# Altium PCB STM32_PCB_Design.PcbDoc
Units mm, origin at the board's own origin, x right, y up, seen from the top; angles counter-clockwise.
Board outline 31 x 33 mm, 4 copper layers (Top Layer, L2 (GND), L3 (GND), Bottom Layer), stack 1.57 mm thick; 35 components, 27 nets, 170 pads, 63 vias.
Unrouted connection lines stored in the file: 2.
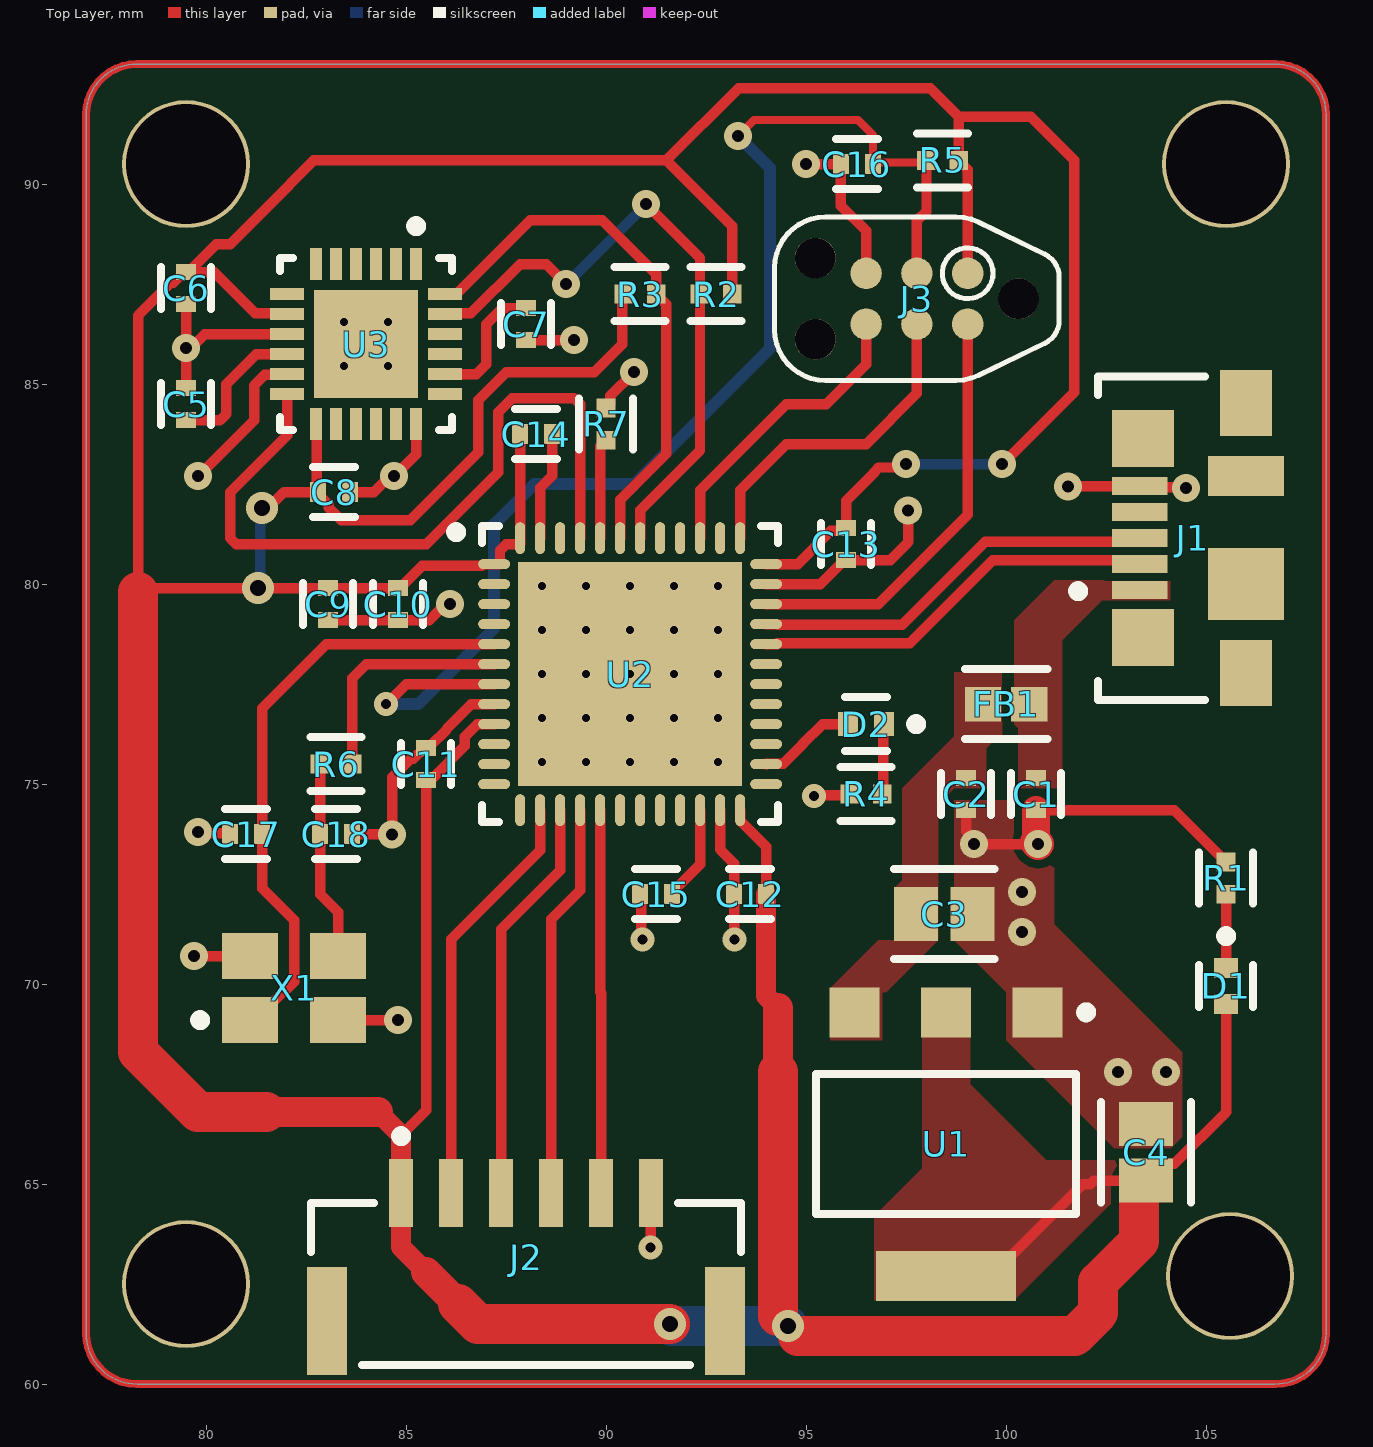
[diagram p0: Top Layer view]
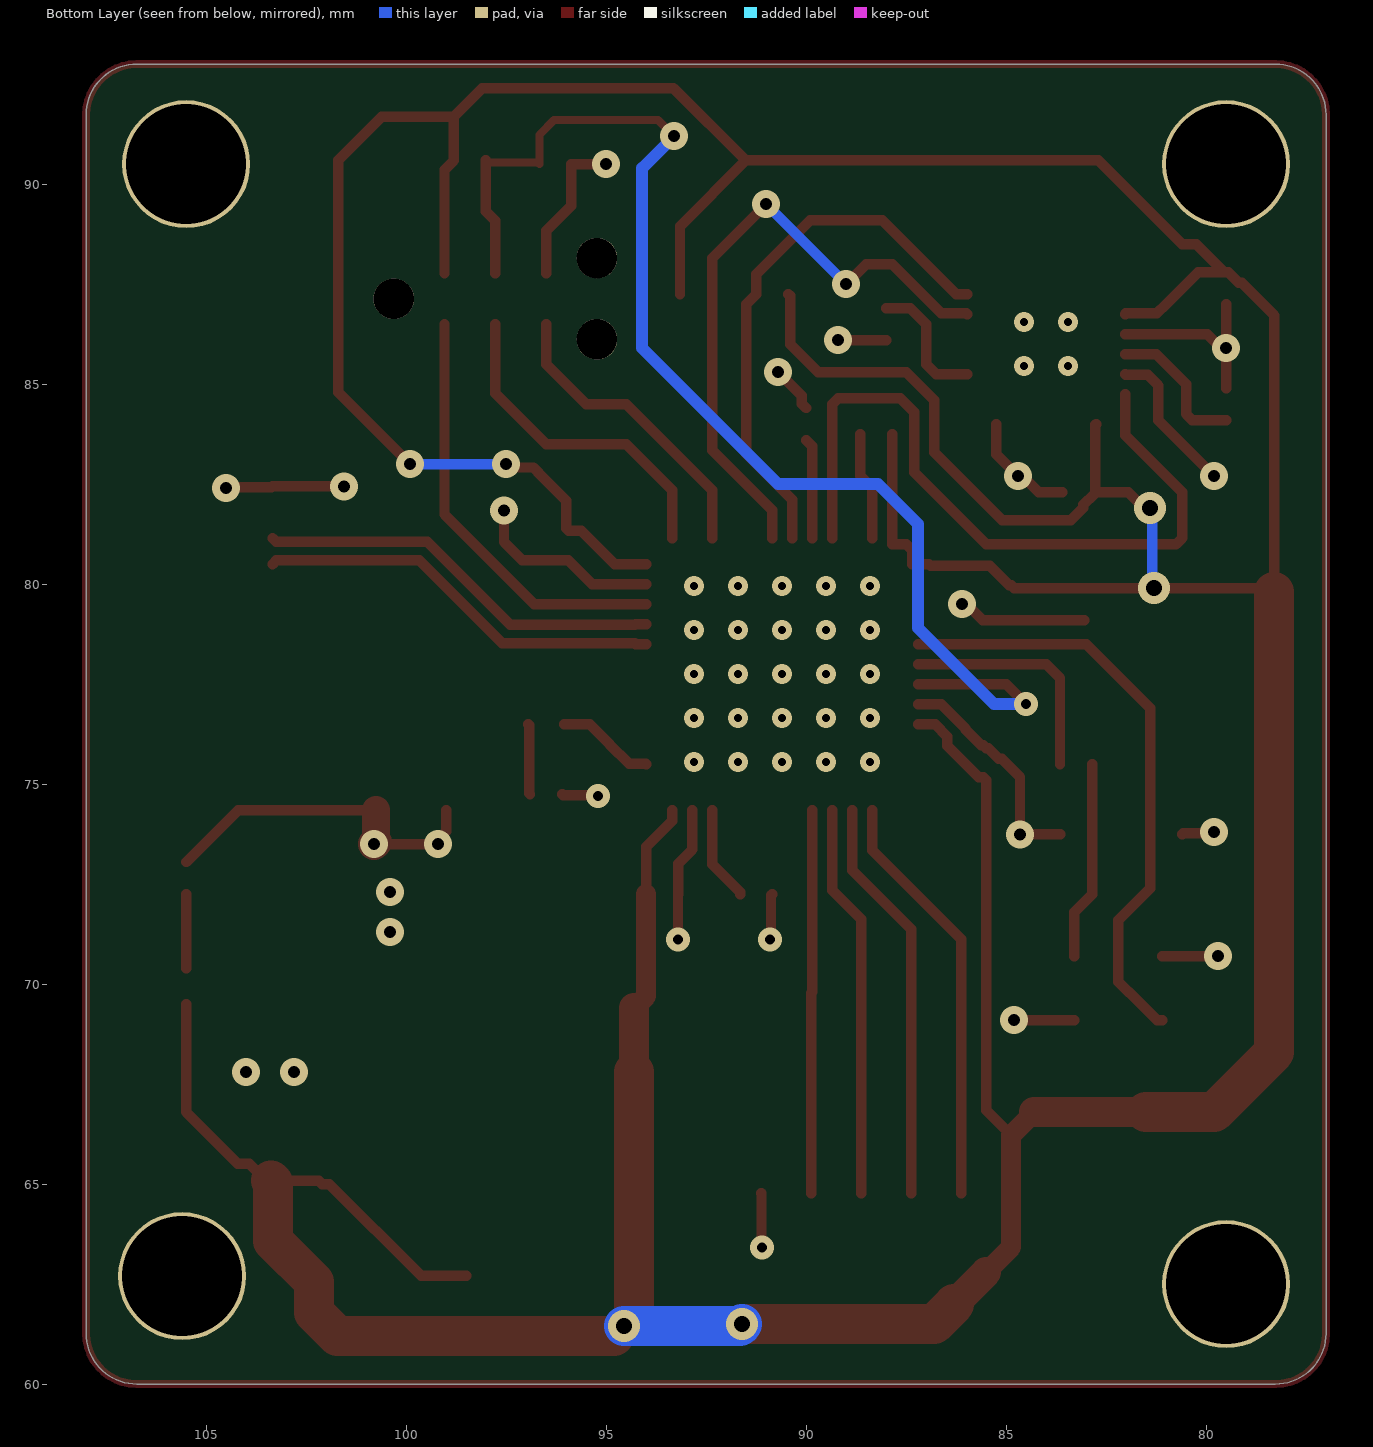
[diagram p1: Bottom Layer view, seen from below]
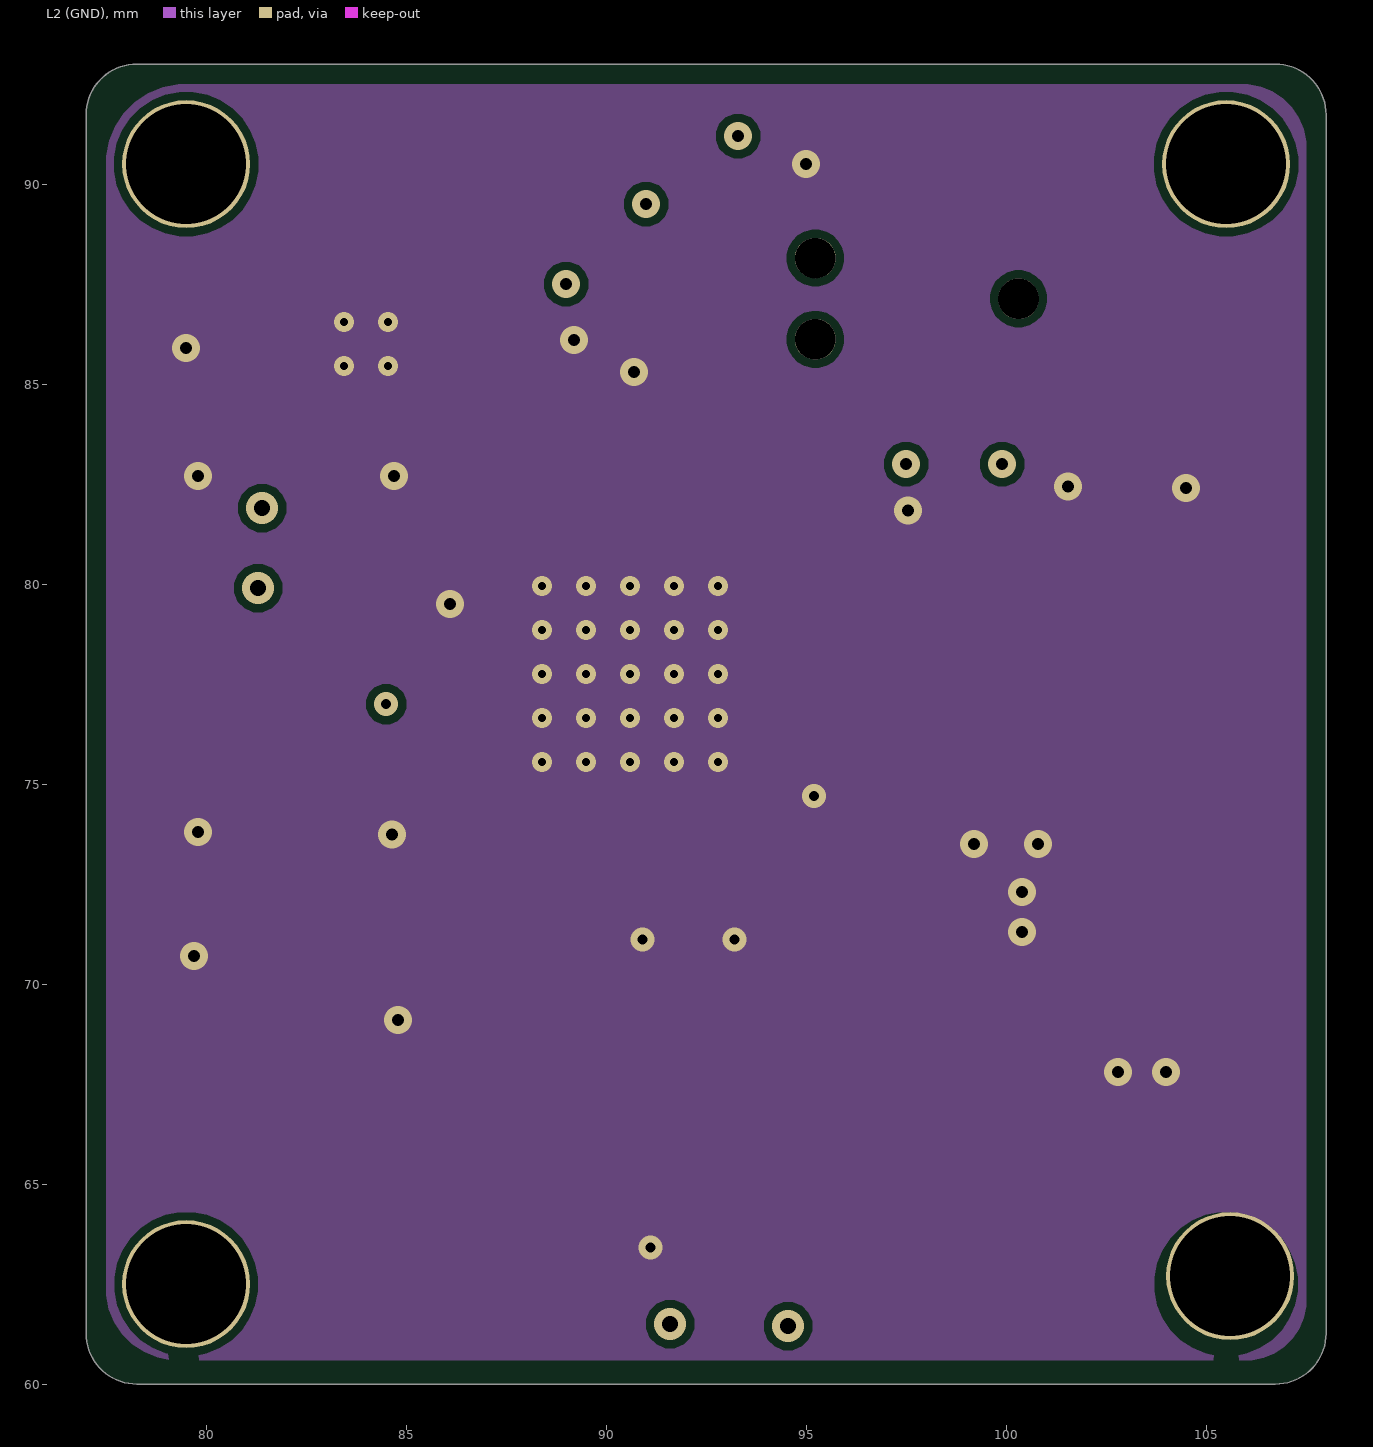
[diagram p2: L2 (GND)]
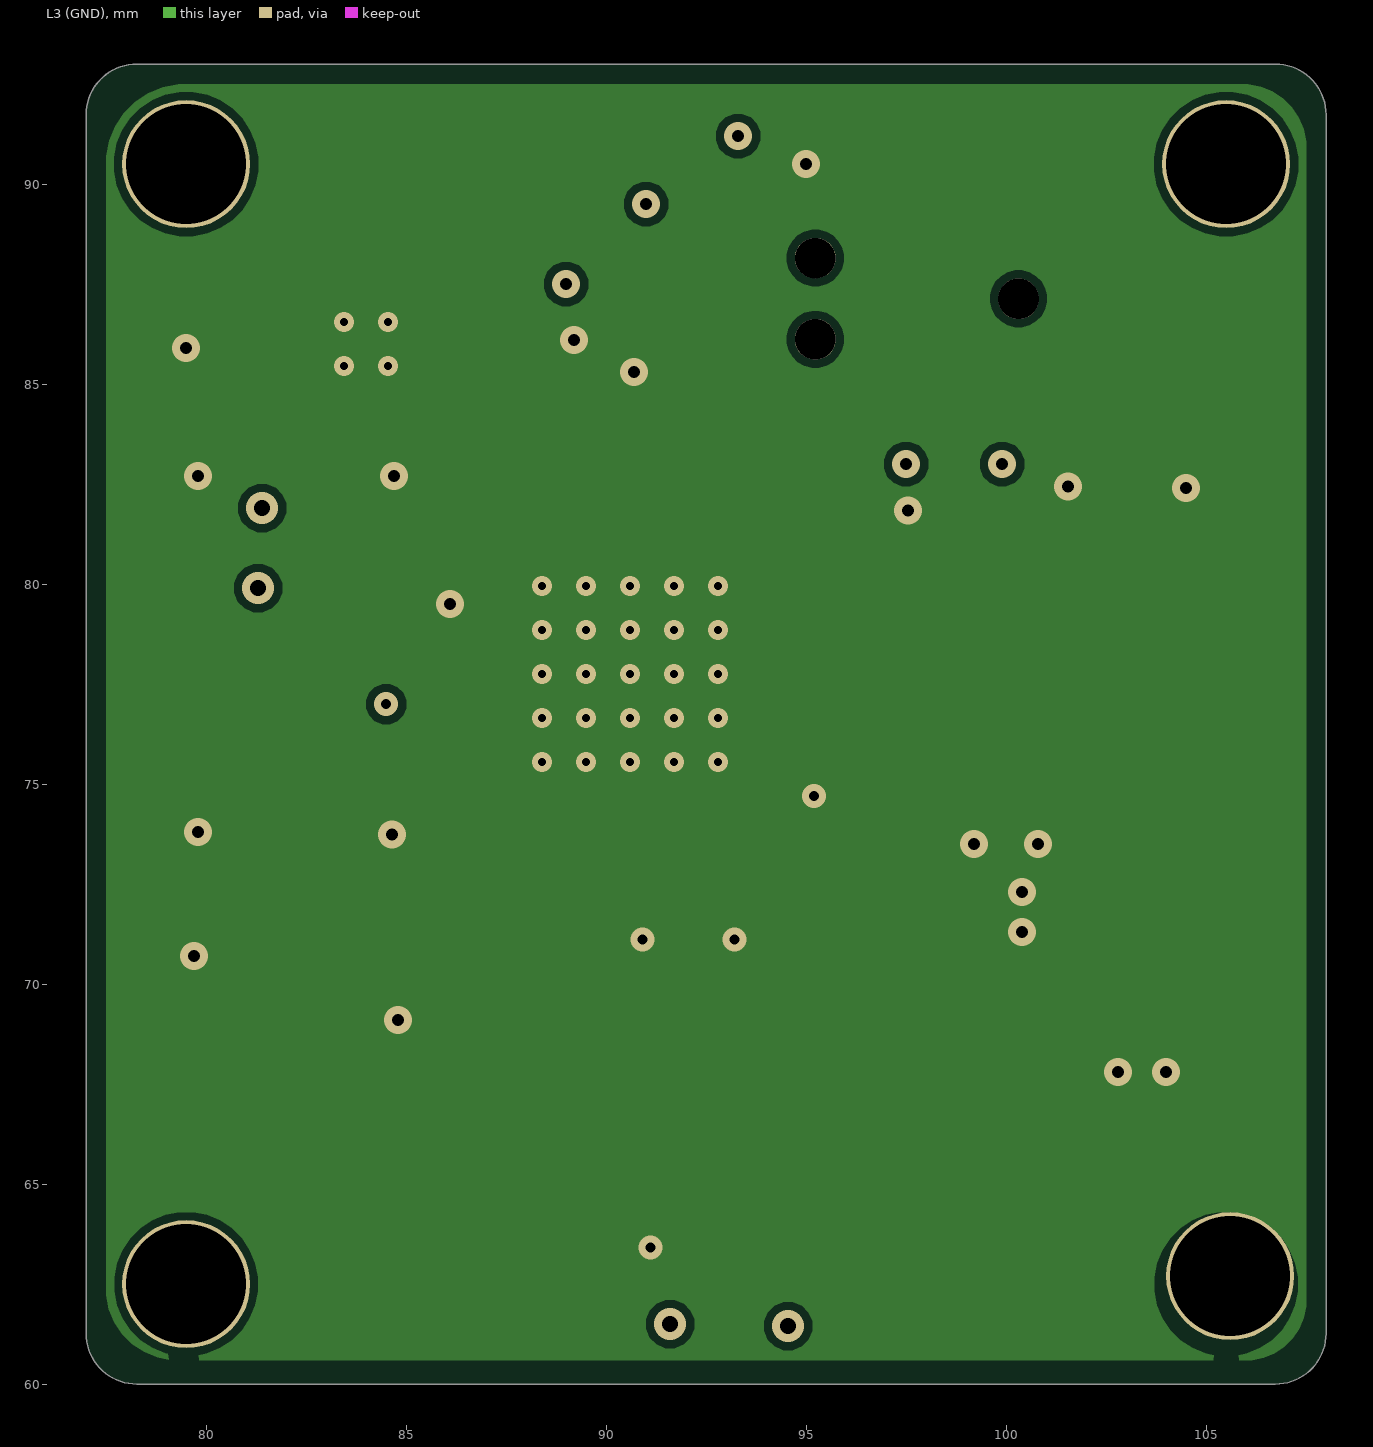
[diagram p3: L3 (GND)]
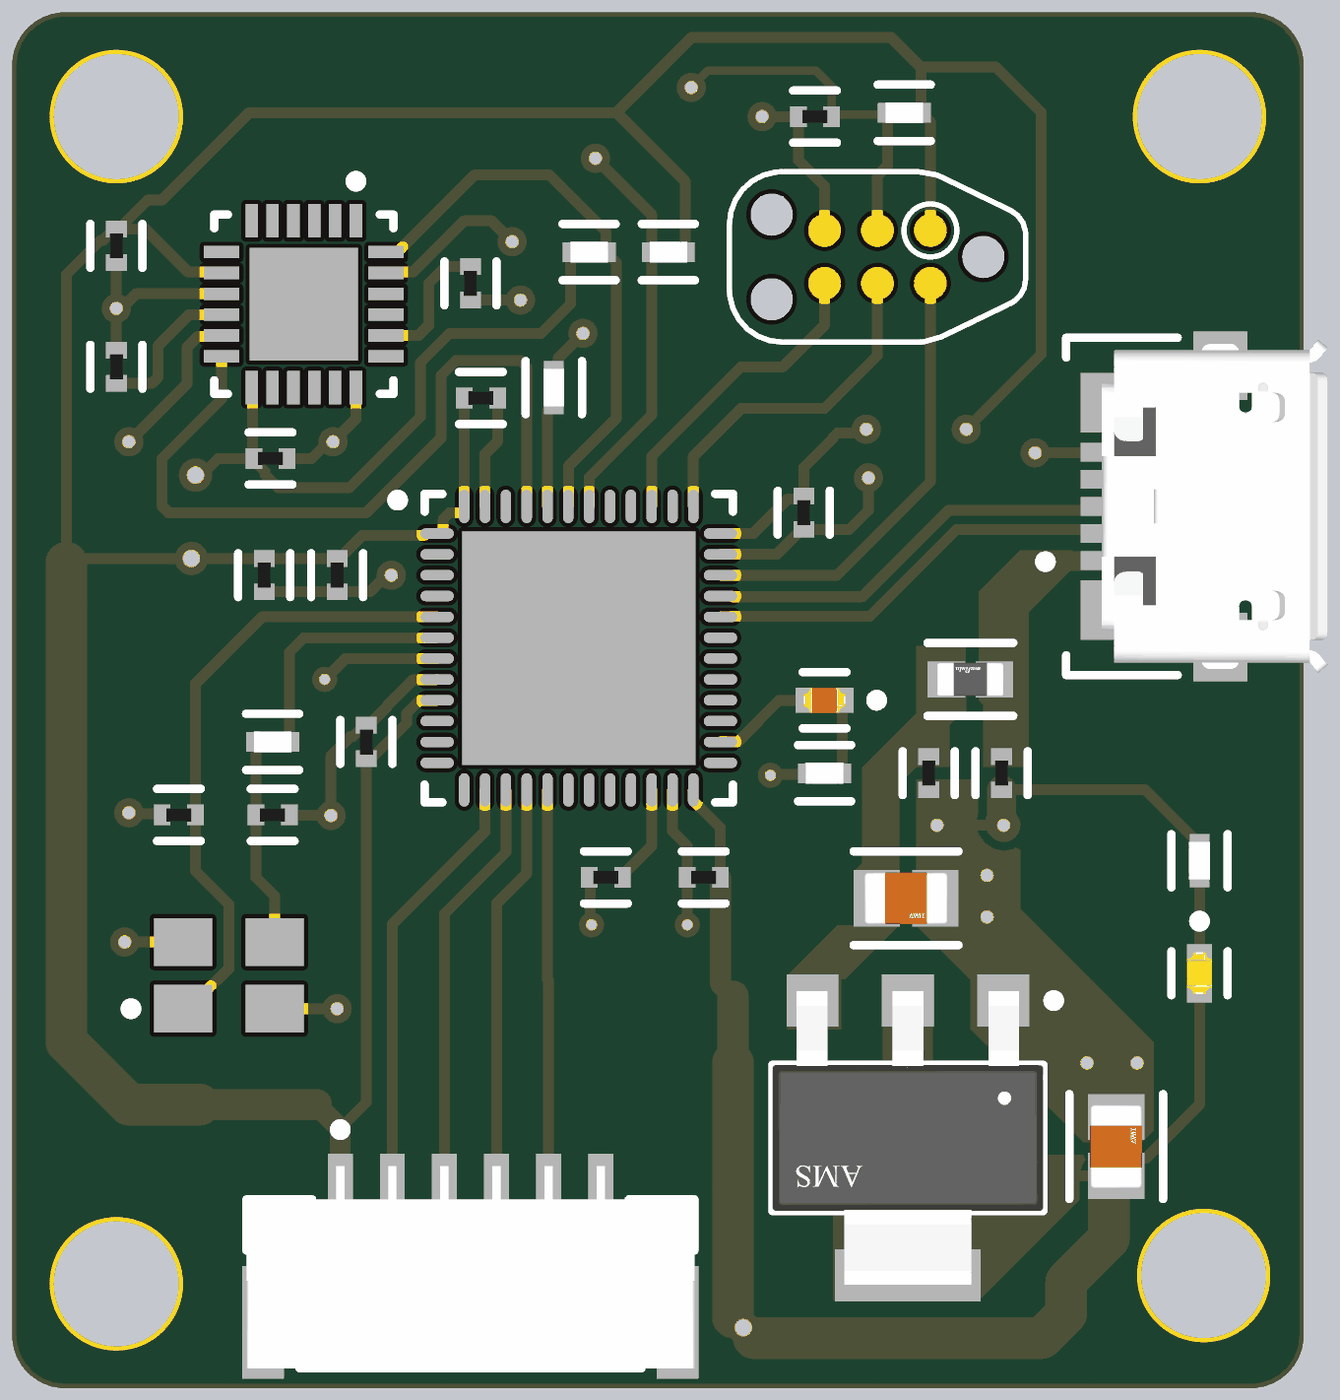
[diagram p4: 3D render of the assembled board from above, using the file's embedded part models]

## Layer stack, top to bottom
Top Solder: solder mask 0.0254, SM-001, Dk 4
Top Layer: signal copper 0.035
Dielectric 1: prepreg 0.2, PP-017, Dk 4.6
L2 (GND): signal copper 0.0175
Dielectric 3: core 1.065, Core-039, Dk 4.6
L3 (GND): signal copper 0.0175
Dielectric 5: prepreg 0.2, PP-017, Dk 4.6
Bottom Layer: signal copper 0.035
Bottom Solder: solder mask 0.0254, SM-001, Dk 4

## Board outline
77,61.27 77,91.73 cw(c78.27,91.73) 78.27,93 106.73,93 cw(c106.73,91.73) 108,91.73 108,61.27 cw(c106.73,61.27) 106.73,60 78.27,60 cw(c78.27,61.27)

## Design rules (kind name [scope] priority, off if disabled: settings)
Clearance [All] p1: gap=0.2 ignorepadtopadclearanceinfootprint=FALSE
DiffPairsRouting [All] p1: maxlimit=0.254 minlimit=0.203 mostfreqgap=0.254 toplayer_maxgap=0.203 toplayer_prefgap=0.203 toplayer_minwidth=0.26 toplayer_maxwidth=0.26 toplayer_prefwidth=0.26 bottomlayer_maxgap=0.203 bottomlayer_prefgap=0.203 bottomlayer_minwidth=0.26 bottomlayer_maxwidth=0.26 bottomlayer_prefwidth=0.26 impedanceprofiledriven=TRUE impedanceprofileid={CE58807C-ADA3-45CD-A579-9E1DF08962FE} impedanceprofilevalue=90.000000 maxuncoupledlength=12.7
PolygonConnect [All] p1: connectstyle=Direct reliefconductorwidth=0.254 reliefentries=4 polygonreliefangle="90 Angle" airgapwidth=0.254
RoutingVias [All] p1: holewidth=0.3 width=0.7 viastyle="Through Hole" minholewidth=0.25 minwidth=0.55 maxholewidth=0.4 maxwidth=0.9
SolderMaskExpansion [All] p1: expansion=0.102 istentingtop=FALSE
UnRoutedNet [All] p1: checkbadconnections=TRUE
Width [All] p1: maxlimit=1 minlimit=0.2 preferedwidth=0.3 midlayer1_minwidth=0.254 midlayer1_maxwidth=0.254 midlayer1_prefwidth=0.254 midlayer2_minwidth=0.254 midlayer2_maxwidth=0.254 midlayer2_prefwidth=0.254 minimp=50.000000 maximp=50.000000 favimp=50.000000
28 further rules are at their usual default settings.

## Classes and differential pairs
differential pair class DIFF_USB: USB_D
differential pair USB_D: +USB_D_P -USB_D_N

## Components (designator, comment, footprint, x,y, rotation, side; value= is the part's Value field where it differs from the comment)
C1 "2.2u" FP-GRM15-MFG 100.75,74.75 r90 top value=0.10μF
C2 "2.2u" FP-GRM15-MFG 99,74.75 r90 top value=0.10μF
C3 "22u" FP-0805-L_2_01_0_2-W_1_25-IPC_C 98.456,71.75 r0 top
C4 "22u" FP-0805-L_2_01_0_2-W_1_25-IPC_C 103.5,65.794 r90 top
C5 "100n" FP-GRM15-MFG 79.5,84.5 r270 top value=0.10μF
C6 "10n" FP-GRM15-MFG 79.5,87.4 r90 top value=0.10μF
C7 "2.2n" FP-GRM15-MFG 88,86.5 r90 top value=0.10μF
C8 "100n" FP-GRM15-MFG 83.2,82.3 r180 top value=0.10μF
C9 "2.2u" FP-GRM15-MFG 83.05,79.5 r90 top value=0.10μF
C10 "100n" FP-GRM15-MFG 84.8,79.5 r90 top value=0.10μF
C11 "100n" FP-GRM15-MFG 85.5,75.5 r270 top value=0.10μF
C12 "100n" FP-GRM15-MFG 93.6,72.25 r0 top value=0.10μF
C13 "100n" FP-GRM15-MFG 96,81 r90 top value=0.10μF
C14 "100n" FP-GRM15-MFG 88.25,83.75 r180 top value=0.10μF
C15 "2.2u" FP-GRM15-MFG 91.25,72.25 r0 top value=0.10μF
C16 "100n" FP-GRM15-MFG 96.27,90.5 r0 top value=0.10μF
C17 "10p" FP-GRM15-MFG 81,73.75 r0 top value=0.10μF
C18 "10p" FP-GRM15-MFG 83.25,73.75 r180 top value=0.10μF
D1 "SML-P11MTT86" FP-SML-P11MTT86-MFG 105.5,69.95 r270 top
D2 "SML-P11UTT86" FP-SML-P11UTT86-MFG 96.5,76.5 r180 top
FB1 "120R" FP-BLM18-0_15-t0_8-IPC_C 100,77 r180 top
J1 "473460001" FP-473460001-MFG 105.65,81.15 r90 top
J2 "SM06B-GHS-TB(LF)(SN)" FP-SM06B-GHS-TB_LF_SN-MFG 88,62.5 r0 top
J3 "TC2030-CTX" TC2030-IDC-NL 97.77,87.135 r180 top
R1 "1k" FP-CRCW0402-e3-IPC_C 105.5,72.65 r270 top
R2 "2.2k" FP-CRCW0402-e3-IPC_C 92.75,87.25 r0 top
R3 "2.2k" FP-CRCW0402-e3-IPC_C 90.848,87.25 r180 top
R4 "1k" FP-CRCW0402-e3-IPC_C 96.5,74.75 r180 top
R5 "10k" FP-CRCW0402-e3-IPC_C 98.412,90.592 r0 top
R6 "0R" FP-CRCW0402-e3-IPC_C 83.25,75.5 r180 top
R7 "10k" FP-CRCW0402-e3-IPC_C 90,84 r270 top
U1 "AMS1117-3.3" FP-AMS1117-IPC_C 98.5,66 r270 top
U2 "STM32F411CEU6" STM-UFQFPN48_L 90.6,77.75 r0 top
U3 "MPU-6050" IS-QFN-24_V 84,86 r270 top
X1 "TSX-3225 24.0000MF15X-AC3" EPSON-TSX-3225_V 82.2,69.9 r0 top

## Footprints (in the part's own frame and the unit in brackets; to place one, negate y for a bottom-side part, rotate by r counter-clockwise, add the part's x,y. Pads: shape width x height; smd on the part's side, far side on the other; paste and mask are expansions set on the pad)
EPSON-TSX-3225_V [mm] "SMD, 4-Leads, Body 3.2x2.5mm"
  rect 1.4x1.15 smd: 1(-1.1,-0.8) 2(1.1,-0.8) 3(1.1,0.8) 4(-1.1,0.8)
  silkscreen extent -2.47,-0.92 -2.22,-0.68, body extent -1.6,-1.25 1.6,1.25, height 0.6
FP-0805-L_2_01_0_2-W_1_25-IPC_C [mm]
  rect 1.105x1.356 smd paste+0 mask+0: 1(-0.706,0) 2(0.706,0)
  silkscreen extent -1.26,-1.12 1.26,1.12, body extent -1.36,-0.82 1.36,0.82, height 0.25
FP-473460001-MFG [mm]
  rect 0.45x1.38 smd paste+0 mask+0: 1(-1.3,2.31) 2(-0.65,2.31) 3(0,2.31) 4(0.65,2.31) 5(1.3,2.31)
  rect 1.425x1.55 smd paste+0 mask+0: 6(-2.488,2.225) 7(2.488,2.225)
  rect 1.65x1.3 smd paste+0 mask+0: 8(-3.375,-0.35) 11(3.375,-0.35)
  rect 1.8x1.9 smd paste+0 mask+0: 9(-1.15,-0.35)
  rect 1x1.9 smd paste+0 mask+0: 10(1.55,-0.35)
  silkscreen extent -4.05,0.67 4.05,3.97, body extent -4.3,-2.48 4.3,3.45, height 0.25
FP-AMS1117-IPC_C [mm]
  rect 1.25x1.25 smd paste+0 mask+0: 1(-3.295,2.29) 2(-3.295,0) 3(-3.295,-2.29)
  rect 1.25x3.5 smd paste+0 mask+0: 4(3.295,0)
  silkscreen extent -3.42,-3.25 1.75,3.63, body extent -3.9,-3.35 3.9,3.35, height 0.25
FP-BLM18-0_15-t0_8-IPC_C [mm]
  rect 0.906x0.858 smd paste+0 mask+0: 1(-0.576,0) 2(0.576,0)
  silkscreen extent -1.03,-0.87 1.03,0.87, body extent -1.13,-0.58 1.13,0.58, height 0.25
FP-CRCW0402-e3-IPC_C [mm]
  rect 0.468x0.472 smd paste+0 mask+0: 1(-0.402,0) 2(0.402,0)
  silkscreen extent -0.64,-0.67 0.64,0.67, body extent -0.74,-0.38 0.74,0.38, height 0.25
FP-GRM15-MFG [mm]
  rect 0.4x0.5 smd paste+0 mask+0: 1(-0.4,0) 2(0.4,0)
  silkscreen extent -0.53,-0.63 0.53,0.63, body extent -0.7,-0.38 0.7,0.38, height 0.25
FP-SM06B-GHS-TB_LF_SN-MFG [mm]
  rect 0.6x1.7 smd paste+0 mask+0: 1(-3.125,2.275) 2(-1.875,2.275) 3(-0.625,2.275) 4(0.625,2.275) 5(1.875,2.275) 6(3.125,2.275)
  rect 1x2.7 smd paste+0 mask+0: 7(-4.975,-0.925) 8(4.975,-0.925)
  silkscreen extent -5.38,-2.02 5.38,3.82, body extent -5.58,-2.37 5.58,3.22, height 0.25
FP-SML-P11MTT86-MFG [mm]
  rect 0.5x0.6 smd paste+0 mask+0: 1(-0.45,0) 2(0.45,0)
  silkscreen extent -1.37,-0.67 0.53,0.67, body extent -0.8,-0.43 0.8,0.43, height 0.25
FP-SML-P11UTT86-MFG [mm]
  rect 0.5x0.6 smd paste+0 mask+0: 1(-0.45,0) 2(0.45,0)
  silkscreen extent -1.38,-0.67 0.53,0.67, body extent -0.8,-0.43 0.8,0.43, height 0.25
IS-QFN-24_V [mm] "QFN, 24-Leads, Body 4x4mm, Pitch 0.5mm, Thermal Pad 2.7x2.6mm"
  rect 0.8x0.3 smd: 1(-2,1.25) 2(-2,0.75) 3(-2,0.25) 4(-2,-0.25) 5(-2,-0.75) 6(-2,-1.25) 13(2,-1.25) 14(2,-0.75) 15(2,-0.25) 16(2,0.25) 17(2,0.75) 18(2,1.25)
  rect 0.3x0.85 smd mask+0.102: 7(-1.25,-1.975) 8(-0.75,-1.975) 9(-0.25,-1.975) 10(0.25,-1.975) 11(0.75,-1.975) 12(1.25,-1.975) 19(1.25,1.975) 20(0.75,1.975) 21(0.25,1.975) 22(-0.25,1.975) 23(-0.75,1.975) 24(-1.25,1.975)
  rect 2.7x2.6 smd: 25(0,0)
  silkscreen extent -3.07,-2.15 2.15,2.15, body extent -2,-2 2,2, height 0.95
STM-UFQFPN48_L [mm] "QFN, 48-Leads, Body 7.1x7.1mm, Pitch 0.5mm, Thermal Pad 5.6x5.6mm, IPC High Density"
  oval 0.8x0.25 smd: 1(-3.4,2.75) 2(-3.4,2.25) 3(-3.4,1.75) 4(-3.4,1.25) 5(-3.4,0.75) 6(-3.4,0.25) 7(-3.4,-0.25) 8(-3.4,-0.75) 9(-3.4,-1.25) 10(-3.4,-1.75) 11(-3.4,-2.25) 12(-3.4,-2.75) 25(3.4,-2.75) 26(3.4,-2.25) 27(3.4,-1.75) 28(3.4,-1.25) 29(3.4,-0.75) 30(3.4,-0.25) 31(3.4,0.25) 32(3.4,0.75) 33(3.4,1.25) 34(3.4,1.75) 35(3.4,2.25) 36(3.4,2.75)
  oval 0.25x0.8 smd: 13(-2.75,-3.4) 14(-2.25,-3.4) 15(-1.75,-3.4) 16(-1.25,-3.4) 17(-0.75,-3.4) 18(-0.25,-3.4) 19(0.25,-3.4) 20(0.75,-3.4) 21(1.25,-3.4) 22(1.75,-3.4) 23(2.25,-3.4) 24(2.75,-3.4) 37(2.75,3.4) 38(2.25,3.4) 39(1.75,3.4) 40(1.25,3.4) 41(0.75,3.4) 42(0.25,3.4) 43(-0.25,3.4) 44(-0.75,3.4) 45(-1.25,3.4) 46(-1.75,3.4) 47(-2.25,3.4) 48(-2.75,3.4)
  rect 5.6x5.6 smd: 49(0,0)
  silkscreen extent -4.47,-3.7 3.7,3.7, body extent -3.55,-3.55 3.55,3.55, height 0.6
TC2030-IDC-NL [mil]
  round 31 smd paste-39.37: 1(-50,-25) 2(-50,25) 3(0,-25) 4(0,25) 5(50,-25) 6(50,25)
  round 40 hole 40 unplated: ""(-100,0) ""(100,-40) ""(100,40)
  silkscreen extent -140,-80 140,81

## Part data
C1 C2 C5 C6 C7 C8 C9 C10 C11 C12 C13 C14 C15 C16 C17 C18: library part CMP-2100-03641-2, "CAP CER 0.1UF 16V X7R 0402", Capacitance=0.10μF, Manufacturer=Murata, Manufacturer Part Number=GRM155R71C104KA88D, Package=GRM15, Temperature="-55°C to +125°C", Temperature Characteristic=X7R, Temperature Range High=+125°C, Temperature Range Low=-55°C, Tolerance=10%, Voltage Rating=16Vdc, Category=Cap, ComponentLink2Description=Datasheet, ComponentLink2URL=https://search.murata.co.jp/Ceramy/image/img/A01X/G101/ENG/GRM155R71H471KA01-01A.pdf, Device Class L1="Passive Components", Device Class L2=Capacitors, Device Class L3="Ceramic Capacitors", Digikey Description="CAP CER 0.1UF 16V X7R 0402", Height=0.55mm, Ipc Land Pattern Name=CAPC10050X219, Lead Free=yes, Material=Ceramic, Mouser Description="0402 0.1 uF 16V ±10 % Tolerance X7R SMT Multilayer Ceramic Capacitor", Octopart=https://octopart.com/grm155r71c104ka88d-murata-196880, RoHS=TRUE, Standoff Height=0mm
C3 C4: library part CMP-2000-05016-2, "General Purpose Ceramic Capacitor, 0805, 100nF, 10%, X7R, 0.15, 50V", Capacitance=100nF, Case Code (Imperial)=0805, Case Code (Metric)=2012, Dielectric=X7R, Dielectric Material=Ceramic, Insulation Resistance=100GR, Max Operating Temperature=125°C, Min Operating Temperature=-55°C, Package Quantity=4000, Tolerance=10%, Voltage=50V, Case/Package=0805, Depth=1.25mm, Dissipation Factor=2.5%, Height=0.5mm, Lead Free="Lead Free", Length=2mm, Mount="Surface Mount", Number of Pins=2, Packaging="Cut Tape", Radiation Hardening=No, REACH SVHC="No SVHC", RoHS Compliant=Yes, Series="MLCC X7R", Termination=Standard, Thickness=0.037inch, Voltage Rating=50V, Voltage Rating (DC)=50V, Weight=0.001411oz, Width=1.2mm
D1: library part CMP-2000-07126-2, "LED YELLOW/GREEN CLEAR 1006 SMD", Case Code (Imperial)=0402, Case Code (Metric)=1005, Color=Green, Forward Current=20mA, Forward Voltage=1.9V, Lens Color=Colorless, Max Operating Temperature=85°C, Min Operating Temperature=-40°C, Package Quantity=1, Power Rating=54mW, Test Current=1mA, Case/Package=0402, Dominant Wavelength=569nm, Height=0.25mm, Illumination Color=Green, Lead Free="Lead Free", Length=1mm, Lens Style=Diffused, Lens Transparency=Clear, Luminous Intensity=2.1mcd, Mount="Surface Mount", Number of LEDs=1, Number of Pins=2, Packaging="Tape and Reel", Radiation Hardening=No, REACH SVHC="No SVHC", RoHS Compliant=Yes, Series=PicoLED™, Viewing Angle=150°, Wavelength=569nm, Width=0.6mm
D2: library part CMP-08952-000028-1, "LED RED CLEAR 1006 SMD", Case Code (Imperial)=0402, Case Code (Metric)=1005, Color=Red, Forward Current=20mA, Forward Voltage=1.8V, Lens Color=Colorless, Max Operating Temperature=85°C, Min Operating Temperature=-40°C, Package Quantity=1, Test Current=1mA, Case/Package=0402, Dominant Wavelength=621nm, Height=0.25mm, Illumination Color=Red, Lead Free="Lead Free", Length=1mm, Lens Style=Square, Lens Transparency=Clear, Luminous Intensity=5.5mcd, Mount="Surface Mount", Number of LEDs=1, Number of Pins=2, Packaging="Tape and Reel", Radiation Hardening=No, REACH SVHC="No SVHC", RoHS Compliant=Yes, Series=PicoLED™, Viewing Angle=150°, Wavelength=621nm, Width=0.6mm
FB1: library part CMP-0686-00425-3, "Chip Ferrite Bead, 0603, 5Ω @ 100MHz, 0.05Ω, 25%, 800mA", Case Code (Imperial)=0603, Case Code (Metric)=1608, Current rating=700mA, DC Resistance (DCR)=50mR, Max Operating Temperature=125°C, Min Operating Temperature=-55°C, Package Quantity=1, Test Frequency=100MHz, Tolerance=25%, Case/Package=0603, Core Material=Ferrite, DC Current=700mA, Depth=0.8mm, Height=0.8mm, Impedance=5R, Lead Free="Lead Free", Length=1.6mm, Material=Ferrite, Max Current Rating=700mA, Max DC Current=700mA, Military Standard=Not, Number of Circuits=1, Number of Lines=1, Number of Pins=2, Packaging="Tape and Reel", Radiation Hardening=No, REACH SVHC="No SVHC", Shielding=Unshielded, Termination=SMD/SMT, Width=0.8mm
J1: library part CMP-2000-05246-2, "CONN RCPT USB2.0 MICRO B SMD R/A", Current rating=1.8A, Manufacturer=Molex, Package=0, Temperature="-30°C to +85°C", Temperature Range High=+85°C, Temperature Range Low=-30°C, Voltage Rating=30V, Automotive=No, Category=Conn, ComponentLink2Description=Datasheet, ComponentLink2URL=https://www.molex.com/webdocs/datasheets/pdf/en-us/0473460001_IO_CONNECTORS.pdf, Conn Orientation="Right Angle", Contact material=Gold,Nickel, Device Class L1=Connectors, Device Class L2="USB Connectors", Device Class L3=unset, Digikey Description="CONN RCPT USB2.0 MICRO B SMD R/A", Footprint Url=https://www.molex.com/pdm_docs/sd/473460001_sd.pdf, Height=2.945mm, Is Female=yes, Lead Free=Yes, Manufacturer Part Number=473460001, Number Of Contacts=5, Octopart=https://octopart.com/47346-0001-molex-7164928, Pitch=0.65mm, RoHS=TRUE, Shielding=true, Usb Standard="USB 2.0"
J2: library part CMP-17439-000061-1, "CONN HEADER SMD R/A 6POS 1.25MM", Color=Natural, Contact Resistance=50mR, Current rating=1A, Housing Color=Beige, Max Operating Temperature=85°C, Max Voltage Rating (AC)=50V, Min Operating Temperature=-25°C, Connector Type="Outer Shroud Contact", Contact material=Bronze, Contact Plating=Tin, Depth=4.05mm, Fastening Type=Ramp, Housing material=Polyamide, Lead Free="Lead Free", Length=10.75mm, Max Current Rating=1A, Mount="Surface Mount", Number Of Contacts=6, Number of Positions=6, Number of Rows=1, Orientation="Right Angle", Packaging="Tape and Reel", Pitch=1.25mm, Termination=Solder, Voltage Rating=50V
J3: library part CMP-003-000000-1, "CortexÂ® Plug-Of-Nailsâ„¢ Adapter Cable", Package=None, Availability=Unavailable, Component Type=Standard, Design Item ID=TC2030-CTX, MF="Tag-Connect LLC", MP=TC2030-CTX, Pin Count=6, Price=None, SnapEDA_Link=https://www.snapeda.com/parts/TC2030-CTX/Tag-Connect%20LLC/view-part/225831/?ref=snap, Source=SnapEDAsch.SchLib
R1 R2 R3 R4 R5 R6 R7: library part CMP-2002-08122-2, "RES Thick Film, 0Ω, 0.063W, 0402", Case Code (Imperial)=0402, Case Code (Metric)=1005, Max Operating Temperature=155°C, Max Power Dissipation=63mW, Min Operating Temperature=-55°C, Package Quantity=1, Resistance=0mR, Temperature Coefficient=100ppm/°C, Tolerance=5%, Voltage Rating=50V, Case/Package=0402, Composition="Thick Film", Contact Plating=Tin, Depth=0.5mm, Features="Automotive AEC-Q200", Height=0.35mm, Lead Free="Lead Free", Length=1mm, Military Standard=Not, Mount="Surface Mount", Number of Terminations=2, Packaging="Tape and Reel", Power Rating=63mW, Radiation Hardening=No, Termination=SMD/SMT, Voltage Rating (DC)=50V, Weight=2.3E-05oz, Width=0.5mm
U1: library part CMP-209535-000001-1, "LDO Voltage Regulators 1A, 3.3V", Dropout Voltage=1.1V, Manufacturer="Advanced Monolithic Systems", Max Junction Temp=+125°C, Max Power Dissipation=1.2W, Max Supply Voltage=15V, Nominal Supply Current=5mA, Output Current=1A, Output Voltage=3.3V, Package=AMS1117, Temperature="-40°C to +125°C", Temperature Range Low=-40°C, Automotive=No, Category=IC, ComponentLink2Description=Datasheet, ComponentLink2URL=http://www.advanced-monolithic.com/pdf/ds1117.pdf, Device Class L1="Integrated Circuits (ICs)", Device Class L2="Power Management ICs", Device Class L3="Voltage Regulators - Linear", Height=1.8mm, Ipc Land Pattern Name=SOT229P700X180-4, Lead Free=Yes, Manufacturer Part Number=AMS1117-3.3, Number Of Outputs=1, Octopart=https://octopart.com/ams1117-3.3-advanced+monolithic+systems-25899300, Output Type=Fixed, RoHS=TRUE, Standoff Height=0.64mm, Temperature Range High=+125°C
U2: library part CMP-0243-00165-1, "ARM Cortex-M4 32-bit MCU+FPU, 512 KB Flash, 128 KB RAM, 36 I/Os, 48-Pin UFQFPN, -40 to 85 degC, Tray", I/Os (High Current)=36, Operating Frequency(F) (Processor speed) (MHz)=100, Package Description=UFQFPN48, Package Reference="48-Pin Ultra Thin Fine Pitch Quad Flat No-Lead, 7 x 7 x 0.6 mm Body, 0.5 mm Pitch, Exposed Pad", Supply Voltage(Vcc) min (V)=1.7, ComponentLink1Description="Manufacturer URL", ComponentLink1URL=http://www.st.com/, ComponentLink2Description=Datasheet, ComponentLink2URL=http://www.st.com/st-web-ui/static/active/en/resource/technical/document/datasheet/DM00115249.pdf, Core="ARM Cortex-M4", DatasheetVersion="Rev. 6", FLASH Size (Prog) (kB)=512, Internal RAM Size (kB)=128, Mounting Technology="Surface Mount", Packing=Tray
U3: library part CMP-1753-00002-2, "3-Axis Gyroscope, Accelerometer and a Digital Motion Processor(TM) (DMP), 2.375 to 3.46 V, -40 to 85 degC, 24-Pin QFN, RoHS, Tape and Reel", Manufacturer=InvenSense, Standard Package=5,000, Category=Sensors,Transducers, Datasheet URL=http://datasheet.octopart.com/MPU-6050-InvenSense-datasheet-14421344.pdf, Datasheet Version="Rev. 3.3, 05/2012", Dynamic Catalog=MPU-6000™Series, Family=Multifunction, Featured Product=MPU-60506-Axis,IntegratedI²CSolution, Manufacturer URL=http://www.invensense.com/, Online Catalog=MPU-6000™Series, Other Names="1428-1007-2 / MPU6050", Output Type=Digital, Sensor Type=MotionTracking, Unit PriceUSD=Digital
X1: library part CMP-2000-07333-1, "MHz Range Crystal, 24 MHz, -40 to 85 degC, 4-Pin SMD, RoHS, Tape and Reel", Frequency=24MHz, Frequency Stability=10PPM, Load Capacitance=9pF, Manufacturer=Epson, Operating Temperature Range=-40Cto+85C, Package / Case=3.2mmx2.5mm, Package Description="4-Pin Surface Mount Device, Body 3.2 x 2.5 mm", Package Reference=TSX-3225, Brand=EpsonTiming, Datasheet URL=https://support.epson.biz/td/api/doc_check.php?dl=brief_FA-238V_en.pdf, Datasheet Version=12/2015, Drive Level=200uW, ESR=40Ohms, Factory Pack Quantity=250, Height=0.6mm, Length=3.2mm, Manufacturer URL=https://www.eea.epson.com/, Mounting Style=SMD/SMT, Mounting Technology=SurfaceMount, Packaging=Reel, Product Category=Crystals, RoHS=True, Series=TSX-3225, Termination Style=SMD/SMT, Tolerance=10PPM, Type=Crystal, Unit Weight=0.000564oz, Width=2.5mm

## Free pads (board coordinates)
  round 3.2 hole 3 paste+0 mask+0: MH2(79.5,90.5) MH3(105.5,90.5) MH4(105.6,62.7) MH5(79.5,62.5)

## Via types
v1: diameter 0.5, hole 0.2, Top Layer to Bottom Layer, 29 vias
v2: diameter 0.7, hole 0.3, Top Layer to Bottom Layer, tented both sides, 25 vias
v3: diameter 0.6, hole 0.25, Top Layer to Bottom Layer, tented both sides, 5 vias
v4: diameter 0.8, hole 0.4, Top Layer to Bottom Layer, tented both sides, 4 vias

## Nets (pads, with @x,y where several pads share a name; then routed paths per layer and width w, separated by ;. In a path a pad name is that pad's centre, name@x,y a point inside that pad or via, vN(x,y) a via of type N, cw(c..) or ccw(c..) an arc to the next point about the centre after c; other vN are vias at no path point)
+3V3: C4.1 C6.2 C8.2 C9.2 C10.2 C11.2 C12.2 C13.2 C14.2 D1.2 J2.1 J3.1 R2.2 R3.2 R5.2 U1.2 U1.4 U2.1 U2.9 U2.24 U2.36 U2.48 U3.8 U3.13 | length 169.7
  Top Layer w0.26: v4(81.4,81.9) 81.546,81.9 81.946,82.3 C8.2@82.74,82.3 ; U3.8 82.005,86.77 81.23,86.77 81,87 80.2,87.8 C6.2@79.55,87.8 ; U3.13 82.77,83.98 C8.2@82.77,82.33 ; C8.2@82.8,82.25 83.07,81.98 83.07,81.913 83.383,81.6 85.1,81.6 86.8,83.3 86.8,84.6 87.5,85.3 89.7,85.3 90.4,86 90.4,87.204 R3.2 ; 84.875,66.225 85.5,66.85 C11.2 85.57,75.17 85.687,75.17 86.47,75.953 86.47,76.189 86.776,76.495 87.195,76.495 U2.9 ; C14.2 U2.48 87.85,81.005 87.845,81 87.5,81 87.348,80.848 87.348,80.505 87.343,80.5 U2.1 87.195,80.495 86.93,80.495 86.89,80.455 85.405,80.455 84.92,79.97 84.87,79.97 C10.2 C9.2 v4(81.3,79.9) 78.4,79.9 78.3,79.8 78.3,86.717 79.113,87.53 79.18,87.53 79.45,87.8 C6.2 C6.2@79.55,87.8 ; R2.2 93.152,88.948 91.508,90.592 ; U2.24 93.35,74.085 94,73.435 C12.2 ; U2.36 94.79,80.5 95.62,81.33 95.93,81.33 C13.2 96,82.081 96.7,82.781 96.7,82.8 96.816,82.916 97.416,82.916 v2(97.5,83) ; U1.4 99.625,62.705 101.92,65 102.1,65 102.188,65.088 103.374,65.088 C4.1 103.922,65.511 104.208,65.511 105.5,66.803 D1.2 ; J3.1 99.04,90.364 98.814,90.59 R5.2 98.814,91.686 ; v2(99.9,83) 101.7,84.8 101.7,90.6 100.614,91.686 98.814,91.686 ; C6.2@79.55,87.8 80.25,88.5 80.6,88.5 81.5,89.4 82.692,90.592 91.508,90.592 ; 91.508,90.592 93.316,92.4 98.1,92.4 98.814,91.686
  Top Layer w0.5: 84.3,66.8 84.875,66.225 J2.1 84.875,63.425 85.5,62.8 ; C12.2 94,69.7 94.3,69.4
  Top Layer w0.75: 81.5,66.8 84.3,66.8 ; 85.5,62.8 86.3,62 ; 94.3,67.8 94.3,69.4
  Top Layer w1: 78.3,79.8 78.3,68.3 79.8,66.8 81.5,66.8 ; 86.3,62 86.8,61.5 v4(91.6,61.5) ; v4@94.3,61.7 94.3,67.8 ; v4@94.8,61.2 101.714,61.2 102.3,61.786 102.3,62.553 103.322,63.575 103.322,65.036 C4.1@103.374,65.088
  Bottom Layer w0.26: v4(81.3,79.9) 81.35,79.95 81.35,81.85 v4(81.4,81.9) ; v2(97.5,83) v2(99.9,83)
  Bottom Layer w1: v4(91.6,61.5) 91.65,61.45 v4(94.55,61.45)
+5V: C2.2 C3.1 FB1.2 U1.3
GND: C1.1 C2.1 C3.2 C4.2 C5.1 C6.1 C7.1 C8.1 C9.1 C10.1 C11.1 C12.1 C13.1 C14.1 C15.1 C16.1 C17.1 C18.1 J1.5 J2.6 J3.5 pad.MH4 R1.1 R4.2 R7.1 U1.1 U2.8 U2.23 U2.35 U2.47 U2.49 U3.1 U3.9 U3.11 U3.18 U3.25 X1.2 X1.4 | length 56.4
  Top Layer w0.26: C5.1 v2(79.5,85.9) ; C6.1 v2(79.5,85.9) ; v2(79.7,70.7) X1.4 ; v2(79.8,73.8) 79.825,73.775 80.575,73.775 C17.1 ; v2(79.8,82.7) 81.2,84.1 81.2,84.967 81.463,85.23 82.005,85.23 U3.11 ; U3.9 79.969,86.25 79.619,85.9 v2(79.5,85.9) ; C9.1 C10.1 85.581,79.1 85.981,79.5 v2(86.1,79.5) ; X1.2 v2(84.8,69.1) ; C8.1 84.19,82.3 84.59,82.7 v2(84.7,82.7) 85.25,83.25 U3.18 ; C18.1 83.657,73.743 84.646,73.743 v2(84.653,73.735) 84.653,75.17 85.113,75.63 85.18,75.63 85.45,75.9 C11.1 85.57,75.97 85.62,75.97 86.01,76.36 86.01,76.379 86.626,76.995 87.195,76.995 U2.8 ; C7.1 v2@89.281,86.1 ; U2.47 88.35,82.41 88.65,82.71 C14.1 ; R7.1 90.002,84.402 90.106,84.506 90.106,84.706 v2(90.7,85.3) ; C15.1 90.878,72.222 90.878,71.141 v3(90.906,71.113) ; v3(91.106,63.413) 91.115,63.422 91.115,64.765 J2.6 ; U2.23 92.85,73.365 93.2,73.015 C12.1 93.203,72.247 93.203,71.116 v3(93.206,71.113) ; U2.35 95.35,80 95.95,80.6 C13.1 97.1,80.6 97.553,81.053 v2(97.553,81.835) ; v2(95,90.5) C16.1 95.87,89.461 96.5,88.831 J3.5 ; v3(95.2,74.7) 95.225,74.725 96.073,74.725 R4.2 ; C2.1 99,73.819 99.2,73.619 v2(99.2,73.5) v2(100.8,73.5) ; C1.1 104.2,74.35 R1.1 R1.1 ; v2(101.553,82.435) 101.56,82.443 103.333,82.443 J1.5 103.365,82.425 104.475,82.425 v2(104.5,82.4)
  Top Layer w0.7: v2@100.75,73.55 C1.1
  Top Layer w0.8: v2@100.75,73.55 v2(100.8,73.5)
  other v1: 88.4,75.55 89.5,75.55 90.6,75.55 91.7,75.55 92.8,75.55 88.4,76.65 89.5,76.65 90.6,76.65 91.7,76.65 92.8,76.65 88.4,77.75 89.5,77.75 90.6,77.75 91.7,77.75 92.8,77.75 88.4,78.85 89.5,78.85 90.6,78.85 91.7,78.85 92.8,78.85 88.4,79.95 89.5,79.95 90.6,79.95 91.7,79.95 92.8,79.95 83.45,85.45 84.55,85.45 83.45,86.55 84.55,86.55
  other v2: 102.8,67.8 104,67.8 100.4,71.3 100.4,72.3 89.2,86.1
"IMU _SCL": R2.1 U2.42 U3.23 | length 16.1
  Top Layer w0.26: U3.23 85.995,86.77 86.619,86.77 87.849,88 88.5,88 v2(89,87.5) ; U2.42 90.85,81.85 92.348,83.348 R2.1 92.348,88.152 v2(91,89.5)
  Bottom Layer w0.26: v2(89,87.5) v2(91,89.5)
"IMU _SDA": R3.1 U2.43 U3.24 | length 13.8
  Top Layer w0.26: U3.24 86.25,87.25 88.1,89.1 89.9,89.1 91.25,87.75 R3.1 91.5,86.998 91.5,83.259 90.35,82.109 U2.43
"IMU CPOUT": C7.2 U3.20 | length 3.3
  Top Layer w0.26: U3.20 86.75,85.25 87,85.5 87,86.5 87.4,86.9 C7.2
"IMU INT": U2.45 U3.12 | length 18.8
  Top Layer w0.26: U3.12 82.025,83.725 80.6,82.3 80.6,81.152 80.752,81 85.5,81 87.3,82.8 87.3,84.3 87.65,84.65 89.198,84.65 89.35,84.498 U2.45
"IMU REGOUT": C5.2 U3.10 | length 3.6
  Top Layer w0.26: C5.2 80.348,84.1 80.5,84.252 80.5,85 81.25,85.75 U3.10
LED_P_K: D1.1 R1.2 | length 1.8
  Top Layer w0.26: D1.1 R1.2
"MCU OSC IN": C17.2 U2.5 X1.1 | length 15.1
  Top Layer w0.26: X1.1 81.225,69.1 81.92,69.795 81.937,69.795 82.2,70.058 82.2,71.6 81.4,72.4 C17.2 81.4,76.9 83,78.5 U2.5
"MCU OSC OUT": R6.1 U2.6 | length 5.8
  Top Layer w0.26: R6.1 83.652,77.652 84,78 U2.6
MCU_BOOT0: R7.2 U2.44 | length 2.5
  Top Layer w0.26: U2.44 89.85,83.45 89.998,83.598 R7.2
MCU_LED_A: D2.2 U2.26 | length 2.5
  Top Layer w0.26: U2.26 94.005,75.505 94.423,75.505 94.917,75.998 94.917,76.007 95.41,76.5 D2.2
MCU_LED_K: D2.1 R4.1 | length 1.8
  Top Layer w0.26: R4.1 96.926,74.774 96.926,76.476 D2.1
MCU_NRST: C16.2 J3.3 R5.1 U2.7 | length 32.1
  Top Layer w0.2: v2(93.3,91.2) 93.7,91.6 96.3,91.6 96.67,91.23 C16.2 96.716,90.546 97.964,90.546 R5.1
  Top Layer w0.26: v3(84.5,77) 85,77.5 U2.7 ; J3.3 97.77,89.079 98.01,89.319 R5.1
  Bottom Layer w0.3: v3(84.5,77) 85.3,77 87.2,78.9 87.2,81.5 88.2,82.5 90.7,82.5 94.1,85.9 94.1,90.4 v2(93.3,91.2)
MCU_PA4: J2.2 U2.14 | length 10.5
  Top Layer w0.26: J2.2 86.125,71.125 88.35,73.35 U2.14
MCU_PA5: J2.3 U2.15 | length 10.2
  Top Layer w0.26: J2.3 87.375,71.375 88.85,72.85 U2.15
MCU_PA6: J2.4 U2.16 | length 9.9
  Top Layer w0.26: J2.4 88.625,71.625 89.35,72.35 U2.16
MCU_PA7: J2.5 U2.17 | length 9.6
  Top Layer w0.26: U2.17 89.85,69.802 89.875,69.777 J2.5
MCU_SCLK: J3.4 U2.37 | length 8.4
  Top Layer w0.26: U2.37 93.35,82.35 94.5,83.5 96.5,83.5 97.77,84.77 J3.4
MCU_SWDIO: J3.2 U2.34 | length 10.7
  Top Layer w0.26: U2.34 96.8,79.5 99.04,81.74 J3.2
MCU_SWO: J3.6 U2.39 | length 7.7
  Top Layer w0.26: U2.39 92.35,82.35 94.5,84.5 95.5,84.5 96.5,85.5 J3.6
MCU_VCAP1: C15.2 U2.22 | length 2.4
  Top Layer w0.26: C15.2 91.65,72.3 92.35,73 U2.22
USB_D_N: J1.2 U2.32 | length 10.2
  Top Layer w0.26: U2.32 94.265,78.5 94.283,78.518 97.593,78.518 99.668,80.593 103.247,80.593 J1.2
USB_D_P: J1.3 U2.33 | length 10.2
  Top Layer w0.26: U2.33 94.265,79 94.283,78.982 97.401,78.982 99.476,81.057 103.247,81.057 J1.3
VBUS: C1.2 FB1.1 J1.1
"XTAL IN": C18.2 R6.2 X1.3 | length 5
  Top Layer w0.26: R6.2 82.849,75.499 82.849,73.751 C18.2 82.85,72.25 83.3,71.8 X1.3
pads on no net: J1.4 J1.6 J1.7 J1.8 J1.9 J1.10 J1.11 J2.7 J2.8 J3. U2.2 U2.3 U2.4 U2.10 U2.11 U2.12 U2.13 U2.18 U2.19 U2.20 U2.21 U2.25 U2.27 U2.28 U2.29 U2.30 U2.31 U2.38 U2.40 U2.41 U2.46 U3.2 U3.3 U3.4 U3.5 U3.6 U3.7 U3.14 U3.15 U3.16 U3.17 U3.19 U3.21 U3.22
copper on no net: | length 125.8
  Top Layer w0.2: 77,61.27 ccw(c78.27,61.27) 78.27,60 106.73,60 ccw(c106.73,61.27) 108,61.27 108,91.73 ccw(c106.73,91.73) 106.73,93 81,93 78.27,93 ccw(c78.27,91.73) 77,91.73 77,61.27

## Polygon pours and split planes (outlines as drawn)
+3V3 on Top Layer "BOTTOM" (solid, pour order 4): 100.2,62.1 102.6,64.5 104.2,64.5 104.2,65.6 101,65.6 99.1,67.5 99.1,69.9 97.9,69.9 97.9,65.4 96.7,64.2 96.7,62.1
GND on Top Layer "BOTTOM" (solid, pour order 8): 101.2,74.6 98.7,74.6 98.7,71.1 100,69.8 100,68.6 102.7,65.9 104.3,65.9 104.4,66 104.4,68.3 101.2,71.5
+5V on Top Layer "BOTTOM" (solid, pour order 3): 97.4,74.9 97.4,72.6 97.2,72.4 97.2,71.1 96.8,71.1 95.6,69.9 95.6,68.6 96.9,68.6 96.9,69.8 97,69.8 98.3,71.1 98.3,74.5 98.7,74.9 99.5,74.9 99.5,75.9 99.8,76.2 99.9,76.2 99.9,77.8 98.7,77.8 98.7,76.2
VBUS on Top Layer "BOTTOM" (solid, pour order 2): 100.2,76.5 100.3,76.4 100.3,74.9 101.3,74.9 101.4,75 101.4,78.6 102.4,79.6 104.1,79.6 104.1,80.1 101.2,80.1 100.2,79.1
GND on L2 (GND) "BOTTOM" (solid, pour order 5): 77.5,90.5 cw(c79.5,90.5) 79.5,92.5 105.9,92.5 cw(c105.9,90.9) 107.5,90.9 107.5,62.1 cw(c106,62.1) 106,60.6 79.3,60.6 cw(c79.3,62.4) 77.5,62.4
GND on L3 (GND) "BOTTOM" (solid, pour order 6): 77.5,90.5 cw(c79.5,90.5) 79.5,92.5 105.9,92.5 cw(c105.9,90.9) 107.5,90.9 107.5,62.1 cw(c106,62.1) 106,60.6 79.3,60.6 cw(c79.3,62.4) 77.5,62.4